# Altium PCB PCB_2D.PcbDoc (part 1 of 2)
Units mm, origin at the board's own origin, x right, y up, seen from the top; angles counter-clockwise.
Board outline 202 x 202 mm, 2 copper layers (Top Layer, Bottom Layer); 193 components, 102 nets, 533 pads, 52 vias.
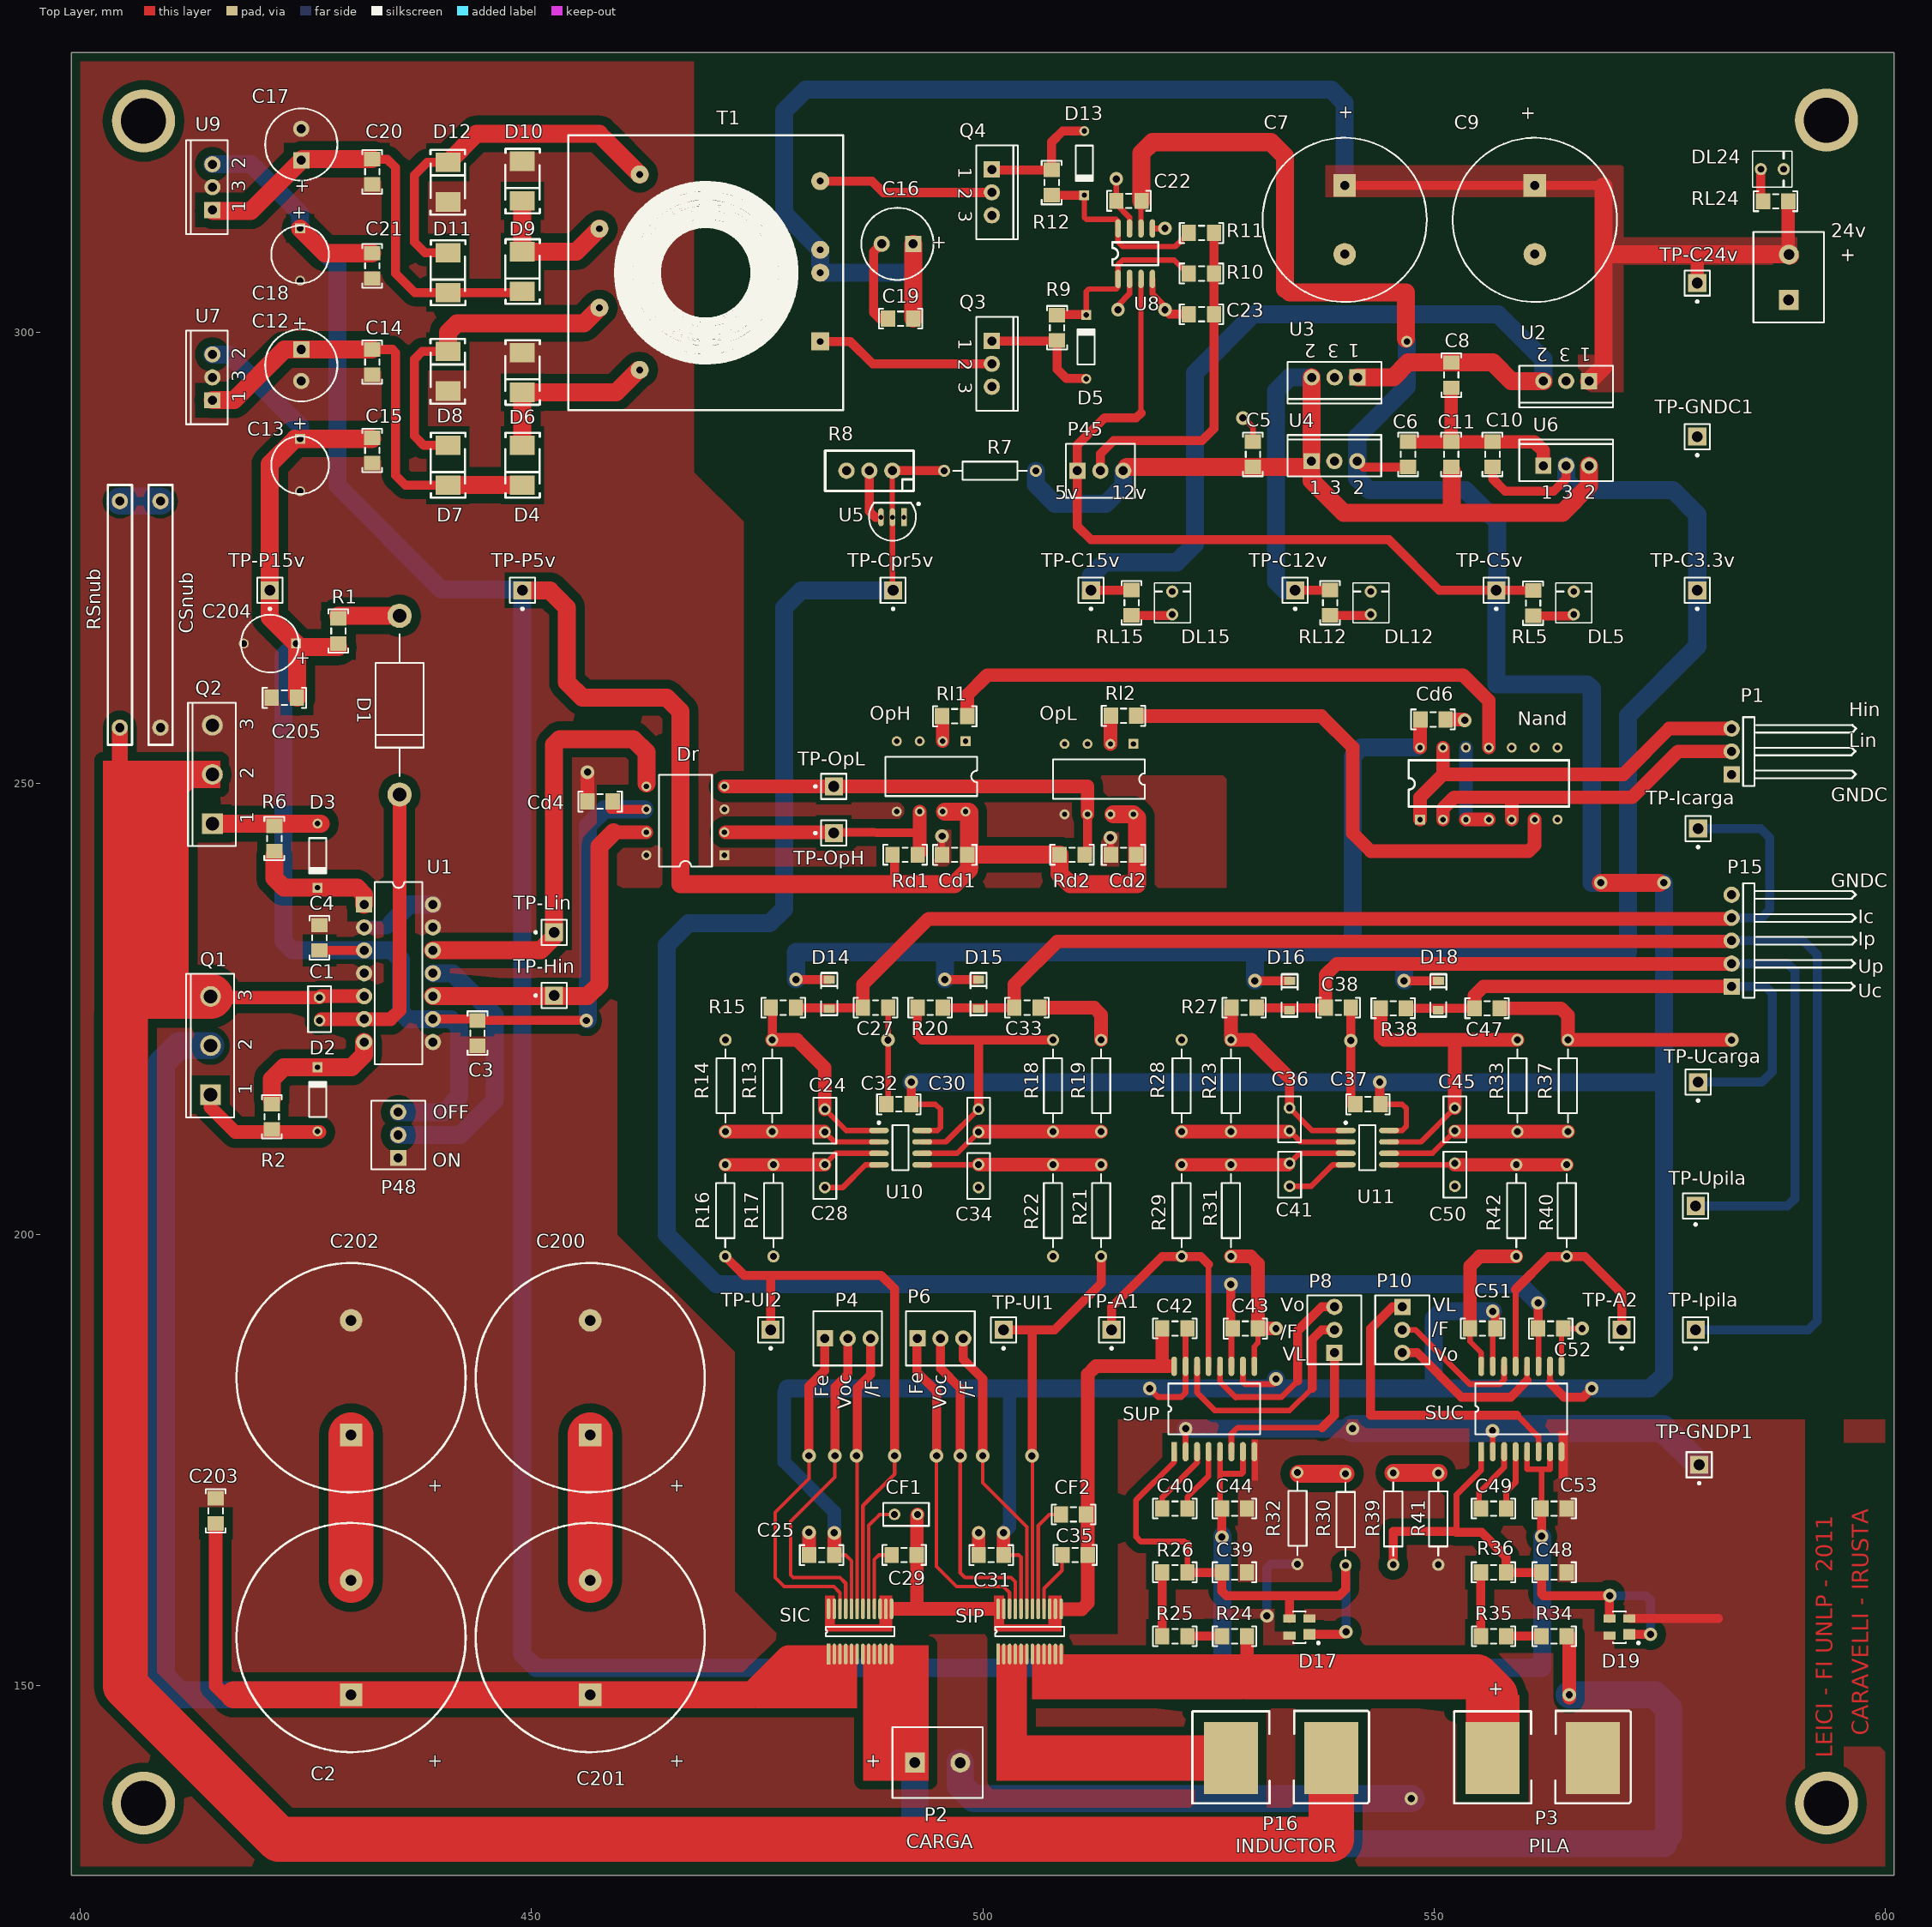
[diagram p0: Top Layer view]
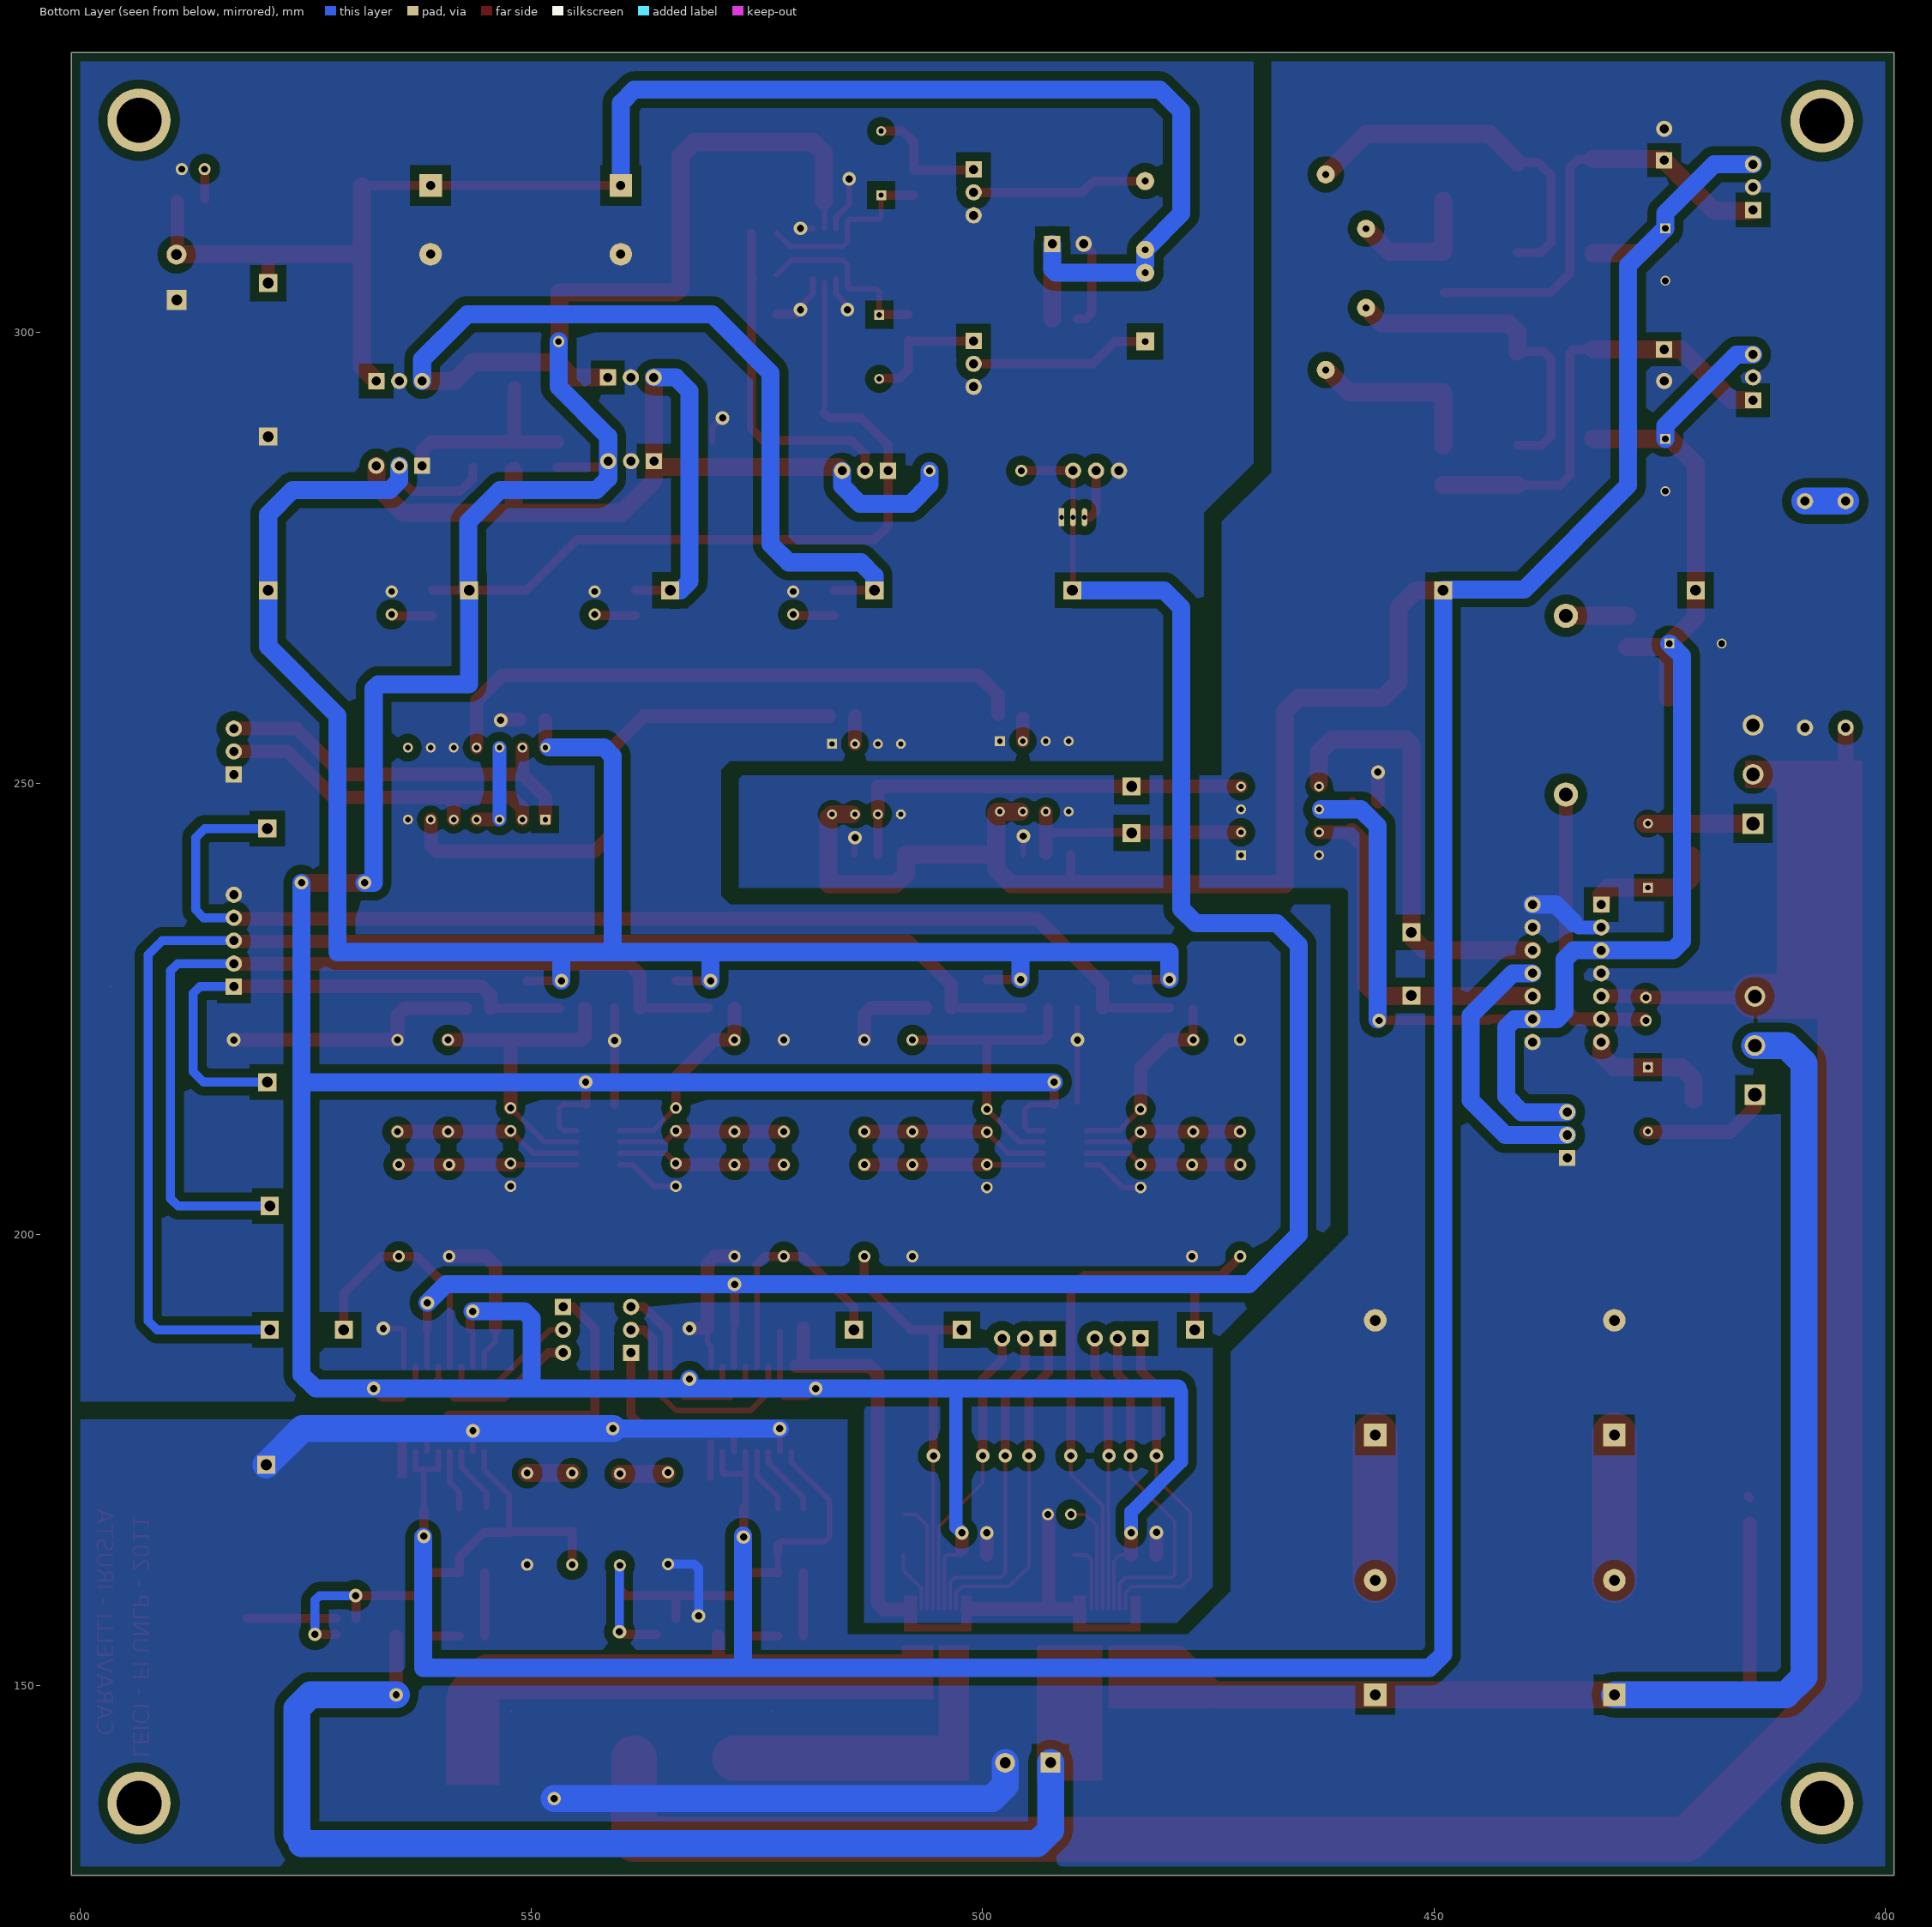
[diagram p1: Bottom Layer view, seen from below]

## Layer stack, top to bottom
Top Layer: signal copper 0.0356
Dielectric: dielectric 0.32, FR-4, Dk 4.8
Bottom Layer: signal copper 0.0356

## Board outline
399,331 601,331 601,129 399,129 399,331

## Design rules (kind name [scope] priority, off if disabled: settings)
Clearance [InPolygon] p1: gap=1
PolygonConnect [All] p1: connectstyle=Direct reliefconductorwidth=0.254 reliefentries=4 polygonreliefangle="90 Angle"
RoutingVias [All] p1: holewidth=0.8 width=1.5 viastyle="Through Hole" minholewidth=0.8 minwidth=1.5 maxholewidth=0.8 maxwidth=1.5
SilkscreenOverComponentPads [All] p1: minsilkscreentomaskgap=0.254
SolderMaskExpansion [All] p1: expansion=0.102
Width [All] p1: maxlimit=6 minlimit=0.2 preferedwidth=1 minimp=50.000000 maximp=50.000000 favimp=50.000000
27 further rules are at their usual default settings.

## Classes and differential pairs
component class "sensor de tension": C36 C37 C38 C39 C40 C41 C42 C43 C44 C45 C47 C48 C49 C50 C51 C52 C53 D16 D17 D18 D19 P8 P10 P15 R23 R24 R25 R26 R27 R28 R29 R30 R31 R32 R33 R34 R35 R36 R37 R38 R39 R40 R41 R42 SUC SUP TP-A1 TP-A2 TP-Ucarga TP-Upila U11
component class "sensor de corriente": C24 C25 C27 C28 C29 C30 C31 C32 C33 C34 C35 CF1 CF2 D14 D15 P4 P6 R13 R14 R15 R16 R17 R18 R19 R20 R21 R22 SIC SIP TP-Icarga TP-Ipila TP-UI1 TP-UI2 U10
component class fuentes_15V_5V_3.3V: 24v C5 C6 C7 C8 C9 C10 C11 C12 C13 C14 C15 C16 C17 C18 C19 C20 C21 C22 C23 D4 D5 D6 D7 D8 D9 D10 D11 D12 D13 DL5 DL12 DL15 DL24 P45 Q3 Q4 R7 R8 R9 R10 R11 R12 RL5 RL12 RL15 RL24 T1 TP-C3.3v TP-C5v TP-C12v TP-C15v TP-C24v TP-Cpr5v TP-P5v TP-P15v U2 U3 U4 U5 U6 U7 U8 U9
component class "driver y convertidor": C1 C2 C3 C4 C200 C201 C202 C203 C204 C205 Cd1 Cd2 Cd4 Cd6 Csnub D1 D2 D3 Dr L1 Nand OpH OpL P1 P2 P3 P16 P48 Q1 Q2 R1 R2 R6 Rd1 Rd2 Rl1 Rl2 RSnub TP-GNDC1 TP-GNDP1 TP-Hin TP-Lin TP-OpH TP-OpL U1

## Components (designator, comment, footprint, x,y, rotation, side; value= is the part's Value field where it differs from the comment)
24v "Alimentacion 24v" HDR1X2-POT* 589.32,306.096 r90 top (schematic designator 1)
C1 "CapBootstrap" RAD-0.1 426.5,225 r90 top
C2 "Cap Pol1" RB12.7-25* 430,149 r270 top
C3 "Cap3" 8-1206 444,223.73 r270 top
C4 "Cap4" 8-1206 426.5,231.5 r90 top
C5 "Cap5" 8-1206 529.951,285.062 r90 top
C6 "Cap6" 8-1206 547.145,285.062 r90 top
C7 "Cap Pol1" RB7.6-18.2* 540.111,312.454 r90 top
C8 "Cap8" 8-1206 551.922,296.645 r270 top
C9 "Cap Pol1" RB7.6-18.2* 561.193,312.454 r90 top
C10 "Cap10" 8-1206 556.5,285.062 r90 top
C11 "Cap11" 8-1206 551.922,285.062 r90 top
C12 "Cap Pol1" RB3.5-8* 424.475,298.093 r270 top
C13 "Cap Pol1" RB5.8-6.4* 424.35,285.283 r270 top
C14 "Cap14" 8-1206 432.349,295.293 r90 top
C15 "Cap15" 8-1206 432.349,285.5 r90 top
C16 "Cap Pol1" RB3.5-8* 492.3,309.8 r180 top
C17 "Cap Pol1" RB3.5-8* 424.475,319.05 r90 top
C18 "Cap Pol1" RB5.8-6.4* 424.35,308.611 r270 top
C19 "Cap19" 8-1206 489.5,301.5 r0 top
C20 "Cap20" 8-1206 432.349,316.375 r90 top
C21 "Cap21" 8-1206 432.349,305.961 r90 top
C22 "Cap22" 8-1206 514.799,314.556 r0 top
C23 "Cap23" 8-1206 525.639,302 r180 top
C24 "Cap24" RAD-0.1 482.5,212.635 r90 top
C25 "Cap25" 8-1206 483.546,164.5 r180 top
C27 "Cap27" 8-1206 486.721,225.145 r0 top
C28 "Cap28" RAD-0.1 482.5,206.5 r270 top
C29 "Cap29" 8-1206 489.896,164.5 r0 top
C30 "Cap30" RAD-0.1 499.542,212.635 r90 top
C31 "Cap31" 8-1206 502.342,164.5 r180 top
C32 "Cap32" 8-1206 492.094,214.452 r180 top
C33 "Cap33" 8-1206 503.5,225.145 r0 top
C34 "Cap34" RAD-0.1 499.542,206.5 r270 top
C35 "Cap35" 8-1206 508.847,164.5 r0 top
C36 "Cap36" RAD-0.1 534,212.77 r90 top
C37 "Cap37" 8-1206 544.094,214.452 r180 top
C38 "Cap38" 8-1206 538,225.145 r0 top
C39 "Cap39" 8-1206 526.5,162.569 r0 top
C40 "Cap40" 8-1206 519.893,169.637 r0 top
C41 "Cap41" RAD-0.1 534.009,206.635 r270 top
C42 "Cap42" 8-1206 519.893,189.599 r0 top
C43 "Cap43" 8-1206 530.5,189.599 r180 top
C44 "Cap44" 8-1206 526.5,169.637 r0 top
C45 "Cap45" RAD-0.1 552.33,212.77 r90 top
C47 "Cap47" 8-1206 554.5,225.084 r0 top
C48 "Cap48" 8-1206 561.93,162.569 r0 top
C49 "Cap49" 8-1206 555.211,169.637 r0 top
C50 "Cap50" RAD-0.1 552.33,206.635 r270 top
C51 "Cap51" 8-1206 554,189.599 r0 top
C52 "Cap52" 8-1206 564.343,189.599 r180 top
C53 "Cap53" 8-1206 561.93,169.637 r0 top
C200 "Cap Pol1" RB12.7-25* 456.5,177.8 r270 top
C201 "Cap Pol1" RB12.7-25* 456.5,149 r270 top
C202 "Cap Pol1" RB12.7-25* 430,177.8 r270 top
C203 "Cap4" 8-1206 415,168 r90 top
C204 "Cap Pol1" RB5.8-6.4* 421,265.5 r180 top
C205 "Cap4" 8-1206 424,259.5 r180 top
Cd1 "Capd1" 8-1206 498.298,242.096 r180 top
Cd2 "Capd2" 8-1206 517,242.096 r180 top
Cd4 "Capd2" 8-1206 459,248 r180 top
Cd6 "Capd2" 8-1206 548.5,257.08 r0 top
CF1 "CapF1" RAD-0.1 491.5,169 r180 top
CF2 "CapF2" 8-1206 511.466,169 r180 top
CSnub "CapSnub" FOOTSNUB 408.872,268.73 r270 top (schematic designator Csnub)
D1 "MUR160 (460)" "CASE 267*" 435.5,263.5 r270 top
D2 "Diode 1N4148" DO-35 426.285,215 r90 top
D3 "Diode 1N4148" DO-35 426.285,242 r270 top
D4 "MBR0540" CASE403A* 448.986,285.26 r270 top
D5 "Diode 1N4148" DO-35 511.466,298.377 r90 top
D6 "MBR0540" CASE403A* 448.986,295.547 r270 top
D7 "MBR0540" CASE403A* 440.731,285.26 r270 top
D8 "MBR0540" CASE403A* 440.731,295.674 r90 top
D9 "MBR0540" CASE403A* 448.986,306.723 r270 top
D10 "MBR0540" CASE403A* 448.986,316.756 r270 top
D11 "MBR0540" CASE403A* 440.731,306.596 r270 top
D12 "MBR0540" CASE403A* 440.731,316.629 r90 top
D13 "Diode 1N4148" DO-35 511.254,318.741 r270 top
D14 "BAT54" SOD123* 483,226.645 r90 top
D15 "BAT54" SOD123* 499.542,226.645 r90 top
D16 "BAT54" SOD123* 534.009,226.5 r90 top
D17 "BAS28" SOT-143* 535.094,156.5 r90 top
D18 "BAT54" SOD123* 550.5,226.5 r90 top
D19 "BAS28" SOT-143* 570.566,156.5 r90 top
DL5 "LED4" LED-1* 565.5,270 r180 top
DL12 "LED3" LED-1* 543,270 r180 top
DL15 "LED2" LED-1* 521,270 r180 top
DL24 "LED1" LED-1* 587.5,318.078 r90 top
Dr "TC4427" TC4424-DIP8 471.38,242.05 r180 top
Nand "74HCT00" MM74HC00_GON 548.466,246 r90 top
OpH "6N137" 6N137 498.096,254.68 r270 top
OpL "6N137" 6N137 516.693,254.38 r270 top
P1 "Header 3H" HDR1X3H* 583,251 r90 top
P2 "Header 2" HDR1X2-POT* 495,141.5 r0 top
P3 "Header 2" IND-CONECTOR 556.5,142 r0 top
P4 "Header 3" HDR1X3* 482.5,188.5 r0 top
P6 "Header 3" HDR1X3* 492.77,188.5 r0 top
P8 "Header 3" HDR1X3* 538.968,186.909 r90 top
P10 "Header 3" HDR1X3* 546.5,191.989 r270 top
P15 "Header 5" HDR1X5H* 583,227.5 r90 top
P16 "Header 2" IND-CONECTOR 527.504,142 r0 top
P45 "Header 3" HDR1X3* 510.5,284.654 r0 top
P48 "Header 10" HDR1X3* 435.23,208.5 r90 top
Q1 "IRFP250" TO-247AC 414.426,215.5 r90 top
Q2 "IRFP250" TO-247AC 414.626,245.55 r90 top
Q3 "IRF7380" TO220-MOS 501,296.5 r270 top
Q4 "IRF7380" TO220-MOS 501,315.5 r270 top
R1 "Rbootstrap" 8-1206 428.6,265.5 r90 top
R2 "Res2" 8-1206 421.2,214.452 r270 top
R6 "Res6" 8-1206 421.5,242.5 r90 top
R7 "Res7" AXIAL-0.4 500.802,284.654 r0 top
R8 "RPot" VR* 487.439,284.654 r0 top
R9 "Res9" 8-1206 508.237,301.904 r270 top
R10 "Res10" 8-1206 522.839,306.5 r0 top
R11 "Res11" 8-1206 525.639,311 r180 top
R12 "Res12" 8-1206 507.647,315.191 r90 top
R13 "Res13" AXIAL-0.4 476.672,216.496 r90 top
R14 "Res14" AXIAL-0.4 471.5,216.496 r270 top
R15 "Res15" 8-1206 476.5,225.145 r0 top
R16 "Res16" AXIAL-0.4 471.465,202.666 r90 top
R17 "Res17" AXIAL-0.4 476.799,202.666 r270 top
R18 "Res18" AXIAL-0.4 507.787,216.496 r90 top
R19 "Res19" AXIAL-0.4 513.121,216.496 r270 top
R20 "Res20" 8-1206 492.77,225.145 r0 top
R21 "Res21" AXIAL-0.4 513.121,202.666 r90 top
R22 "Res22" AXIAL-0.4 507.787,202.666 r270 top
R23 "Res23" AXIAL-0.4 527.504,216.496 r90 top
R24 "Res24" 8-1206 529.3,155.5 r180 top
R25 "Res25" 8-1206 522.693,155.502 r180 top
R26 "Res26" 8-1206 519.893,162.569 r0 top
R27 "Res27" 8-1206 527.565,225.145 r0 top
R28 "Res28" AXIAL-0.4 522.043,216.496 r270 top
R29 "Res29" AXIAL-0.4 522.043,202.666 r90 top
R30 "Res30" AXIAL-0.4 540.216,168.435 r90 top
R31 "Res31" AXIAL-0.4 527.504,202.666 r270 top
R32 "Res32" AXIAL-0.4 534.882,168.562 r270 top
R33 "Res33" AXIAL-0.4 559.263,216.496 r90 top
R34 "Res34" 8-1206 564.724,155.502 r180 top
R35 "Res35" 8-1206 558.011,155.502 r180 top
R36 "Res36" 8-1206 555.211,162.569 r0 top
R37 "Res37" AXIAL-0.4 564.851,216.496 r270 top
R38 "Res38" 8-1206 544.094,225.084 r0 top
R39 "Res39" AXIAL-0.4 545.5,168.5 r90 top
R40 "Res40" AXIAL-0.4 564.724,202.666 r90 top
R41 "Res41" AXIAL-0.4 550.49,168.5 r270 top
R42 "Res42" AXIAL-0.4 559.136,202.666 r270 top
Rd1 "Rd1" 8-1206 490,242.096 r0 top
Rd2 "Rd2" 8-1206 508.5,242.096 r0 top
Rl1 "Rd1" 8-1206 498.298,257.453 r180 top
Rl2 "Rd1" 8-1206 517,257.5 r180 top
RL5 "ResL5" 8-1206 561,268.58 r90 top
RL12 "ResL12" 8-1206 538.5,268.629 r90 top
RL15 "ResL15" 8-1206 516.5,268.629 r90 top
RL24 "ResL24" 8-1206 586.47,314.507 r0 top
RSnub "ResSnub" FOOTSNUB 404.372,268.73 r270 top
SIC "SI 1 20BB" "SENSOR CORRIENTE ACS 709" 482.911,153.525 r90 top
SIP "SI 1 20BB" "SENSOR CORRIENTE ACS 709" 501.707,153.525 r90 top
SUC "S2" "SENS TENSION HCPL-788J" 555.251,175.946 r90 top
SUP "S1" "SENS TENSION HCPL-788J" 521.215,175.946 r90 top
T1 "Trans BB" TRAFO-2PRI-2SEC 482,298.976 r180 top
TP-A1 "" PIN1 514.28,189.449 r180 top (schematic designator TP-ABSVAL1)
TP-A2 "" PIN1 570.82,189.449 r180 top (schematic designator TP-ABSVAL2)
TP-C3.3v "" PIN1 579.189,271.399 r180 top
TP-C5v "" PIN1 556.907,271.399 r180 top
TP-C12v "" PIN1 534.626,271.399 r180 top
TP-C15v "" PIN1 512,271.399 r180 top
TP-C24v "" PIN1 579.189,305.453 r180 top
TP-Cpr5v "" PIN1 490.063,271.399 r180 top
TP-GNDC1 "" PIN1 579.189,288.426 r180 top
TP-GNDP1 "" PIN1 579.401,174.5 r180 top
TP-Hin "" PIN1 452.5,226.5 r90 top
TP-Icarga "" PIN1 579.283,245 r180 top
TP-Ipila "" PIN1 579,189.449 r180 top
TP-Lin "" PIN1 452.5,233.5 r90 top
TP-OpH "" PIN1 483.5,244.5 r90 top
TP-OpL "" PIN1 483.5,249.67 r90 top
TP-P5v "" PIN1 448.986,271.399 r180 top
TP-P15v "" PIN1 421,271.399 r180 top
TP-Ucarga "" PIN1 579.283,216.906 r180 top
TP-UI1 "" PIN1 502.31,189.449 r180 top
TP-UI2 "" PIN1 476.5,189.449 r180 top
TP-Upila "" PIN1 579,203.177 r180 top
U1 "IR2110" PDIP14 431.444,236.583 r270 top
U2 "MC7815ACT" TO220* 564.668,294.593 r180 top
U3 "MC7812ACT" TO220* 539,295 r180 top
U4 "MC7805ACT" TO220* 538.968,285.712 r0 top
U5 "LM336BZ-5.0" Z03A 489.996,279.5 r90 top
U6 "MC7833ACT" TO220* 564.668,285.212 r0 top
U7 "MC7815ACT" TO220* 414.626,295 r90 top
U8 "MAX845" SO-8 515,305.912 r90 top
U9 "MC7805ACT" TO220* 414.626,316.078 r90 top
U10 "TLC2272" 751-02_N 490.896,209.645 r0 top
U11 "TLC2272" 751-02_N 542.626,209.645 r0 top

## Footprints (in the part's own frame and the unit in brackets; to place one, negate y for a bottom-side part, rotate by r counter-clockwise, add the part's x,y. Pads: shape width x height; smd on the part's side, far side on the other; paste and mask are expansions set on the pad)
6N137 [mm]
  rect 1.1x1.1 hole 0.6: 1(0,0)
  round 1.1 hole 0.6: 2(0,-2.54) 3(0,-5.08) 4(0,-7.62) 5(7.8,-7.62) 6(7.8,-5.08) 7(7.8,-2.54) 8(7.8,0)
  silkscreen extent 1.72,-8.89 6.08,1.27
8-1206 [mm] "Chip Resistor; Body 3.1 x 1.6 mm (LxW typ)"
  rect 1.6x1.8 smd: 1(0,0) 2(2.8,0)
  silkscreen extent -1.02,-1.09 3.81,1.12
751-02_N [mm] "SOIC, 8-Leads, Body 4.9x3.9mm, Pitch 1.27mm, IPC Medium Density"
  oval 2.2x0.6 smd: 1(-2.4,1.905) 2(-2.4,0.635) 3(-2.4,-0.635) 4(-2.4,-1.905) 5(2.4,-1.905) 6(2.4,-0.635) 7(2.4,0.635) 8(2.4,1.905)
  silkscreen extent -2.52,-2.5 0.9,2.88, body extent -1.95,-2.45 1.95,2.45, height 1.75
AXIAL-0.4 [mm] "Axial Device, Thru-Hole; 2 Leads; 0.4 in Pin Spacing"
  round 1.35 hole 0.75: 1(-5.08,0) 2(5.08,0)
  silkscreen extent -4.06,-1.02 4.06,1.02
CASE403A* [mm] "MBRS1100"
  rect 2.16x2.75 smd: 1(-2.2,0) 2(2.2,0)
  silkscreen extent -3.58,-1.91 3.58,1.93
"CASE 267*" [mm] "Axial Diode MUR460, Thru-Hole; 2 Leads"
  round 2.7 hole 1.5: 1(-5.08,-0.127) 2(14.732,-0.127)
  silkscreen extent -3.05,-2.79 12.7,2.54
DO-35 [mm] "Diode, Axial 1n4148; Body 3.8 x 1.9 mm (LxDia. max), Lead Dia. 0.53 mm (max)"
  round 1.1 hole 0.6: 1(-3.55,0)
  rect 1.1x1.1 hole 0.6: 2(3.55,0)
  silkscreen extent -1.95,-0.95 2.05,0.95
FOOTSNUB [mm] "Axial Device, Thru-Hole; 2 Leads; 0.4 in Pin Spacing"
  round 1.8 hole 1: 1(-12.548,0) 2(12.548,0)
  silkscreen extent -14.35,-1.32 14.45,1.35
HDR1X2-POT* [mm] "Connector; Header; 2 Position"
  rect 2.2x2.2 hole 1.2: 1(-2.515,0)
  round 2.2 hole 1.2: 2(2.515,-0.025)
  silkscreen extent -5,-3.91 5,3.91
HDR1X3* [mm] "Connector; Header; 3 Position"
  rect 1.8x1.8 hole 1: 1(0,0)
  round 1.8 hole 1: 2(2.54,0) 3(5.08,0)
  silkscreen extent -1.27,-3 6.35,3
HDR1X3H* [mm] "Connector; Header; 3 Position; Right Angle"
  rect 1.8x1.8 hole 1: 1(0,0)
  round 1.8 hole 1: 2(2.54,0) 3(5.08,0)
  silkscreen extent -1.27,-13.79 6.35,-1.27
HDR1X5H* [mm] "Connector; Header; 5 Position; Right Angle"
  rect 1.8x1.8 hole 1: 1(0,0)
  round 1.8 hole 1: 2(2.54,0) 3(5.08,0) 4(7.62,0) 5(10.16,0)
  Top Layer lines w0.254: 0.013,-13.602 0.025,-13.602
  silkscreen extent -1.27,-13.79 11.43,-1.27
IND-CONECTOR [mm]
  rect 6x8 smd: 1(0,0) 2(11.125,0)
  Top Layer lines w0.254: -4.267,5.131 -4.216,5.182
  silkscreen extent -4.27,-5 15.32,5.23
LED-1* [mm] "LED; 2 Leads"
  round 1.35 hole 0.75: 1(0,1.27) 2(0,-1.27)
  silkscreen extent -2,-2.2 1.98,2.2
MM74HC00_GON [mm]
  rect 1.1x1.1 hole 0.6: 1(0,0)
  round 1.1 hole 0.6: 2(0,-2.54) 3(0,-5.08) 4(0,-7.62) 5(0,-10.16) 6(0,-12.7) 7(0,-15.24) 8(7.976,-15.24) 9(7.976,-12.7) 10(7.976,-10.16) 11(7.976,-7.62) 12(7.976,-5.08) 13(7.976,-2.54) 14(7.976,0)
  silkscreen extent 1.44,-16.51 6.58,1.27
PDIP14 [mm] "DIP; 14 Leads; Row Spacing 7.62 mm; Pitch 2.54 mm"
  rect 1.8x1.8 hole 1: 1(0,0)
  round 1.8 hole 1: 2(2.54,0) 3(5.08,0) 4(7.62,0) 5(10.16,0) 6(12.7,0) 7(15.24,0) 8(15.24,7.62) 9(12.7,7.62) 10(10.16,7.62) 11(7.62,7.62) 12(5.08,7.62) 13(2.54,7.62) 14(0,7.62)
  silkscreen extent -2.48,1.16 17.72,6.46
PIN1 [mm] "Connector; Plug"
  rect 2x2 hole 1.2: 1(0,0)
  silkscreen extent -1.4,-1.4 1.4,2.17
RAD-0.1 [mm] "Radial Cap, Thru-Hole; 2 Leads; 0.1 in Pin Spacing"
  round 1.3 hole 0.75: 1(-1.27,0) 2(1.27,0)
  silkscreen extent -2.54,-1.27 2.54,1.27
RB3.5-8* [mm]
  rect 1.8x1.8 hole 1: 1(0,0)
  round 1.8 hole 1: 2(3.5,0)
  silkscreen extent -2.25,-4 5.75,4
RB5.8-6.4* [mm] "cap feo"
  rect 1.1x1.1 hole 0.75: 1(-2.9,0)
  round 1.1 hole 0.75: 2(2.9,0)
  silkscreen extent -3.2,-3.2 3.2,3.2
RB7.6-18.2* [mm] "Polarized Capacitor (Radial); 2 Leads"
  rect 2.5x2.5 hole 1: 1(3.81,0)
  round 2.5 hole 1: 2(-3.81,0)
  silkscreen extent -9.1,-9.1 9.1,9.1
RB12.7-25* [mm] "Polarized Capacitor (Radial); 2 Leads"
  rect 2.5x2.5 hole 1.2: 1(0,0)
  round 2.5 hole 1.2: 2(-12.7,0)
  silkscreen extent -19.05,-12.7 6.35,12.7
"SENS TENSION HCPL-788J" [mm]
  rect 2.16x0.64 smd: 1(0,0)
  oval 2.16x0.64 smd: 2(0,-1.27) 3(0,-2.54) 4(0,-3.81) 5(0,-5.08) 6(0,-6.35) 7(0,-7.62) 8(0,-8.89) 9(9.47,-8.89) 10(9.47,-7.62) 11(9.47,-6.35) 12(9.47,-5.08) 13(9.47,-3.81) 14(9.47,-2.54) 15(9.47,-1.27) 16(9.47,0)
  silkscreen extent 1.91,-9.53 7.55,0.64
"SENSOR CORRIENTE ACS 709" [mm]
  rect 2.3x0.4 smd: 1(0,0)
  oval 2.3x0.4 smd: 2(0,-0.635) 3(0,-1.27) 4(0,-1.905) 5(0,-2.54) 6(0,-3.175) 7(0,-3.81) 8(0,-4.445) 9(0,-5.08) 10(0,-5.715) 11(0,-6.35) 12(0,-6.985) 13(5,-6.985) 14(5,-6.35) 15(5,-5.715) 16(5,-5.08) 17(5,-4.445) 18(5,-3.81) 19(5,-3.175) 20(5,-2.54) 21(5,-1.905) 22(5,-1.27) 23(5,-0.635) 24(5,0)
  silkscreen extent 1.98,-7.3 3.02,0.32
SO-8 [mil]
  oval 80x24 smd: 1(0,0) 2(0,-50) 3(0,-100) 4(0,-150) 5(220,-150) 6(220,-100) 7(220,-50) 8(220,0)
  silkscreen extent 60,-175 160,25
SOD123* [mm] "SOD-123; 2 Leads; Body 2.7 x 1.6 mm, (LxW)"
  rect 0.91x1.22 smd: 1(-1.63,0.01) 2(1.64,0)
  silkscreen extent -2.37,-0.89 2.36,0.9
SOT-143* [mm] "SOT-143; 4 Leads; Body 3 x 2.6 mm, inc. leads (LxW max)"
  rect 1.2x1.35 smd: 1(-0.8,-1.1)
  rect 0.9x1.35 smd: 2(0.95,-1.1) 3(0.95,1.1) 4(-0.95,1.1)
  silkscreen extent -1.87,-2.23 1.75,0.7
TC4424-DIP8 [mm]
  rect 1.1x1.1 hole 0.6: 1(0,0)
  round 1.1 hole 0.6: 2(0,-2.54) 3(0,-5.08) 4(0,-7.62) 5(8.65,-7.62) 6(8.65,-5.08) 7(8.65,-2.54) 8(8.65,0)
  silkscreen extent 1.38,-8.89 7.27,1.27
TO220* [mm] "TO, Thru-Hole, Vertical, Heatsink Mounted; 3 In-Line Leads; Pitch 2.54 mm; Pin sequence 1, 3, 2"
  rect 1.8x1.8 hole 1: 1(-2.54,0)
  round 1.8 hole 1: 2(2.54,0) 3(0,0)
  silkscreen extent -5.2,-1.7 5.2,2.9
TO220-MOS [mm] "TO, Thru-Hole, Vertical, Heatsink Mounted; 3 In-Line Leads; Pitch 2.54 mm; Pin sequence 1, 3, 2"
  rect 1.8x1.8 hole 1: 1(-2.54,0)
  round 1.8 hole 1: 2(0,0) 3(2.54,0)
  silkscreen extent -5.2,-1.7 5.2,2.9
TO-247AC [mm] "SIP with Mounting Hole; 3 Leads; Body 20 x 15.6 x 5 mm (typ); Pitch 5.45 mm"
  rect 2.3x2.3 hole 1.5: 1(0,0)
  round 2.3 hole 1.5: 2(5.45,0) 3(10.9,0)
  silkscreen extent -2.5,-2.6 13.4,2.7
TRAFO-2PRI-2SEC [mm]
  rect 2x2 hole 0.75: 1(0,0)
  round 2 hole 0.75: 2(0,-7.62) 3(0,-10.16) 4(0,-17.78) 5(20.015,3.15) 6(24.486,-3.734) 7(24.486,-12.497) 8(20.015,-18.517)
  silkscreen extent -2.54,-22.86 27.94,7.62
VR* [mm] "preset multivuelta vertical"
  round 1.8 hole 1: 1(2.54,0) 2(0,0) 3(-2.54,0)
  silkscreen extent -4.9,-2.24 4.9,2.24
Z03A [mm] "TO, Flat Index; 3 In-Line, Axial Leads; Body Dia. 5mm; Leads 0.55 x 0.50 mm (max)"
  rect 2x0.6 hole 0.5: 1(0,-1.27)
  oval 2x0.6 hole 0.5: 2(0,0) 3(0,1.27)
  silkscreen extent -2.6,-3.03 1.6,2.6, body extent -2.61,-2.61 1.6,2.61, height 5.2

## Part data
24v: library part "Header 2", "Header, 2-Pin"
C1 C24 C28 C30 C34 C36 C41 C45 C50: library part Cap, "THRU MULTICAPA 50V"
C2 C7 C9 C12 C13 C16 C17 C18 C200 C201 C202 C204: "Polarized Capacitor (Radial)"
C3 C4 C5 C6 C8 C10 C11 C14 C15 C19 C20 C21 C22 C23 C25 C27 C29 C31 C32 C33 C35 C37 C38 C39 C40 C42 C43 C44 C47 C48 C49 C51 C52 C53 C203 C205 Cd1 Cd2 Cd4 Cd6 CF1 CF2 CSnub: library part Cap, "SMD MULTICAPA 50V"
D1: library part "Diode 1N4007", "THRU"
D2 D3 D5 D13: "THRU"
D4 D6 D7 D8 D9 D10 D11 D12: library part Diode, "SMD"
D14 D16 D17 D18: "SMD"
D15: "Schottky Barrier Diode SMD"
D19: "High-speed Switching, Double Diode SMD"
DL5 DL12 DL15: library part LED1, "Typical RED GaAs LED"
DL24: "Typical RED GaAs LED"
P1: "Header, 3-Pin, Right Angle"
P2 P3 P16: "Header, 2-Pin"
P4 P6 P8 P10 P45: "Header, 3-Pin"
P15: "Header, 5-Pin"
P48: library part "Header 3", "Header, 3-Pin"
Q1 Q2: "HEXFET Power MOSFET"
Q3 Q4: library part IRFP250, "HEXFET Power MOSFET"
R1 R2 R6 R9 R12 R15 R20 R24 R25 R26 R27 R34 R35 R36 R38 Rd1 Rd2 Rl1 Rl2 RL5 RL12 RL15 RL24 RSnub: library part Res1, "SMD 1206"
R7: library part Res3, "Resistor"
R8: "PRESET MULTIVUELTA VERTICAL"
R10 R11 R13 R14 R16 R17 R18 R19 R21 R22 R23 R28 R29 R30 R31 R32 R33 R37 R39 R40 R41 R42: library part Res1, "Resistor"
SIC SIP SUC SUP: library part Component_1
T1: "Buck-boost Transformer (Ideal)"
TP-A1 TP-A2 TP-C3.3v TP-C5v TP-C12v TP-C15v TP-C24v TP-Cpr5v TP-GNDC1 TP-GNDP1 TP-Hin TP-Icarga TP-Ipila TP-Lin TP-OpH TP-OpL TP-P5v TP-P15v TP-Ucarga TP-UI1 TP-UI2 TP-Upila: library part Socket, "Socket"
U1: "High and Low Side Driver"
U2 U3 U6 U7: library part MC7805ACT, "Three-Terminal Positive Voltage Regulator"
U4 U9: "Three-Terminal Positive Voltage Regulator"
U5: "5.0V Reference Diode"
U10 U11: library part TLC27L2ACDR, "LinCMOS Precision Dual Operational Amplifier"

## Free pads (board coordinates)
  round 7 hole 5: 0(407,137) 5(407,323.421) 8(593.5,323.5) 9(593.5,137)
  round 1.5 hole 0.8: 1(541,178.5)

## Via types
v1: diameter 1.5, hole 0.8, Top Layer to Bottom Layer, 51 vias
v2: diameter 1.27, hole 0.711, Top Layer to Bottom Layer, 1 vias

## Nets (pads, with @x,y where several pads share a name; then routed paths per layer and width w, separated by ;. In a path a pad name is that pad's centre, name@x,y a point inside that pad or via, vN(x,y) a via of type N, cw(c..) or ccw(c..) an arc to the next point about the centre after c; other vN are vias at no path point)
C_3.3V: C10.1 Cd6.1 D14.2 D15.2 D16.2 D18.2 Nand.14 TP-C3.3v.1 U6.3 | length 233
  Top Layer w1: v1(479.3,228.285) D14.2@483,228.285 ; v1(495.8,228.285) D15.2@499.5,228.285 ; v1(530.165,228.14) D16.2@534.009,228.14 ; v1(546.694,228.14) D18.2@550.5,228.14 ; C10.1@556.5,285.062 556.5,283.786 557.903,282.383 563.286,282.383 564.668,283.765 U6.3@564.668,285.212
  Top Layer w1.5: Nand.14@548.466,253.976 Cd6.1@548.466,257.046
  Bottom Layer w2: v1@479.306,228.291 479.306,231.306 541,231.306 ; v1(495.8,228.285) 495.8,231.106 ; v1(530.165,228.14) 530.165,231.185 ; v1(546.694,228.14) 546.694,231.306 ; Nand.14@548.074,253.976 541.976,253.976 541,253 541,231.306 ; U6.3@564.668,285.212 564.668,283.556 565.724,282.5 576.5,282.5 579.189,279.811 TP-C3.3v.1@579.189,271.399 579.189,265.189 571.5,257.5 571.5,231.306 546.694,231.306 ; 541,231.306 546.694,231.306
C_5V: C6.1 C22.2 C25.1 C31.1 C32.1 C37.1 C42.2 C51.2 P45.1 RL5.2 SIC.20 SIP.20 SUC.10 SUC.15 SUP.10 SUP.15 TP-C5v.1 U4.2 U8.3 U8.6 U10.8 U11.8 | length 598.2
  Top Layer w0.4: C25.1@483.546,164.5 484.793,164.5 485.451,163.842 SIC.20@485.451,158.525 ; C31.1@502.342,164.5 504,164.5 504.247,164.253 SIP.20@504.247,158.525
  Top Layer w0.6: C32.1@492.094,214.452 494.762,214.452 495.31,213.905 495.31,211.86 495,211.55 U10.8@493.296,211.55 ; 517.54,291.04 U8.3@517.54,305.5 ; U8.6@517.54,311.5 C22.2@517.54,314.497 ; C37.1@544,214.452 C37.1@544.094,214.452 546.5,214.452 546.95,214.002 546.95,212 546.5,211.55 U11.8@545.026,211.55 ; SUC.15@556.521,185.416 C51.2@556.521,189.32
  Top Layer w0.64: v1(518.5,182.949) 519.449,182 522,182 522.485,182.485 SUP.15@522.485,185.416 C42.2@522.485,189.241 ; 528.835,183.705 SUP.10@528.835,185.416 ; 562.871,183.562 SUC.10@562.871,185.416
  Top Layer w0.7: 528.835,183.705 529.107,183.433 532.227,183.433 v1@532.5,183.705
  Top Layer w0.8: v1@532.5,183.705 v1(532.5,184)
  Top Layer w1: C32.1@492.094,214.452 v1(492.094,216.906) ; 517.54,291.04 517,290.5 513.499,290.5 510.5,287.501 P45.1@510.5,284.654 510.5,278.5 512,277 545,277 550.601,271.399 TP-C5v.1@556.907,271.399 RL5.2@560.981,271.399 ; 533.607,304.799 534.009,304.396 ; U4.2@541.508,285.712 542.158,285.062 C6.1@547.145,285.062 ; C37.1@544,214.452 v1(544,216.906) ; v1(556.521,191.5) 556.8,191.221 C51.2@556.8,189.599 ; 562.871,183.562 564.433,182 566.551,182 v1(567.5,182.949)
  Top Layer w1.5: C25.1@483.546,164.5 v1(483.546,166.954) ; C31.1@502.31,165.19 v1(502.31,166.954)
  Top Layer w2: C22.2@517.599,314.556 517.599,319.856 518.81,321.068 531.932,321.068 533.5,319.5 533.5,304.799 ; 534.009,304.396 546.894,304.396 v2@546.894,299.282 ; v1(568.5,239) v1@575,239
  Bottom Layer w1.5: 478.381,182.949 478,182.568 478,174.823 483.546,169.277 v1(483.546,166.954) ; v1(502.31,166.954) 502.977,167.621 502.977,182.685
  Bottom Layer w2: 478.381,182.949 v1(518.5,182.949) 532.5,182.949 ; v1(492.094,216.906) v1(544,216.906) 575.5,216.906 ; v1(532.5,184) 532.5,182.949 ; v2(547,298.976) 547,293.96 541.508,288.468 541.508,283.797 542.805,282.5 553.5,282.5 557,279 TP-C5v.1@557,271.399 ; v1(556.521,191.5) 550.791,191.5 550,190.709 550,182.949 ; 556.907,261 567,261 567.5,260.5 567.5,239 v1(568.5,239) ; 556.907,261.093 TP-C5v.1@556.907,271.399 ; v1(575.5,239) 575.5,216.906 ; 532.5,182.949 550,182.949 ; 550,182.949 v1(567.5,182.949) 573.949,182.949 575.5,184.5 575.5,216.906
C_12V: C5.1 C11.1 P45.3 R7.2 RL12.2 TP-C12v.1 U3.2 U4.1 U6.2 | length 119.5
  Top Layer w1: TP-C12v.1@534.626,271.399 RL12.2@538.47,271.399 ; U4.1@535.778,285.062 U4.1@536.428,285.712 ; U4.1@535.895,285.136 U4.1@536.46,285.701
  Top Layer w2: P45.3@515.988,285.062 C5.1@529.951,285.062 U4.1@535.778,285.062 ; U4.1@536.392,285.136 536.428,283.572 540,280 552,280 ; U4.1@536.46,285.701 U3.2@536.46,295 ; C11.1@552,284.654 552,280 ; U6.2@567.208,285.212 567.208,282.984 564.224,280 552,280
  Bottom Layer w1: TP-C12v.1@534.601,271.399 TP-C12v.1@534.626,271.399
  Bottom Layer w2: R7.2@505.882,284.654 505.882,283.118 508,281 513.617,281 515.58,282.963 P45.3@515.58,284.654 ; TP-C12v.1@534.626,271.399 533.5,271.399 532.5,272.399 532.5,273.5 532.5,293.5 534,295 U3.2@536.46,295
C_15V: C8.1 RL15.2 TP-C15v.1 U2.2 U3.1 | length 105.9
  Top Layer w1: TP-C15v.1@512,271.399 RL15.2@516.47,271.399
  Top Layer w2: U3.1@541.54,295 545.5,295 547.145,296.645 C8.1@551.922,296.645 556.521,296.645 558.573,294.593 U2.2@562.128,294.593
  Bottom Layer w2: TP-C15v.1@512,271.399 512,273 513.5,274.5 521.5,274.5 523.5,276.5 523.5,295.5 530,302 557.122,302 562.128,296.994 U2.2@562.128,294.593
C_24V: 24v.2 C7.1 C9.1 C16.1 C19.2 RL24.2 T1.2 T1.3 TP-C24v.1 U2.1 | length 193.9
  Top Layer w1: C16.1@492.3,309.8 C16.1@492.5,310 ; C7.1@540.111,316.264 C9.1@561.193,316.264 568.702,316.264 568.821,316.145
  Top Layer w1.5: TP-C24v.1@579.189,305.453 579.189,308.518 ; 24v.2@589.27,308.636 RL24.2@589.27,314.507
  Top Layer w2: C19.2@492.3,301.5 C16.1@492.3,309.8 ; U2.1@567.208,294.593 568.821,296.206 568.821,308.636 ; 568.821,316.145 568.821,308.636 ; 24v.2@589.27,308.636 568.821,308.636 ; 24v.2@589.345,308.611 24v.2@589.456,308.5
  Bottom Layer w2: T1.2@482,306.596 491.908,306.596 492.3,306.988 C16.1@492.3,309.8 ; T1.2@482,307.5 T1.3@482,309.136 478,313.136 478,324.5 480.375,326.875 538.625,326.875 540.111,325.389 C7.1@540.111,316.264
C_PREC_5V: C43.2 C52.2 R7.1 R8.1 SUC.11 SUP.11 TP-Cpr5v.1 U5.2 | length 227
  Top Layer w0.6: U5.2@489.979,279.517 R8.1@489.979,284.654 ; TP-Cpr5v.1@489.996,271.466 U5.2@489.996,279.5
  Top Layer w0.64: SUP.11@527.565,185.416 C43.2@527.565,189.464 ; SUC.11@561.601,185.416 C52.2@561.601,189.541
  Top Layer w1: R8.1@489.979,284.654 R7.1@495.722,284.654 ; C43.2@527.504,190.099 v1(527.504,194.5) ; C52.2@561.543,189.599 v1(561.543,192.442)
  Bottom Layer w2: TP-Cpr5v.1@490.063,271.399 479.899,271.399 478,269.5 478,236.106 476.394,234.5 467.42,234.5 465,232.08 465,200 470.5,194.5 v1(527.504,194.5) 559.485,194.5 v1(561.543,192.442)
GNDC: 24v.1 C5.2 C6.2 C7.2 C8.2 C9.2 C10.2 C11.2 C16.2 C19.1 C22.1 C23.2 C25.2 C27.2 C28.2 C29.2 C31.2 C32.2 C33.2 C34.2 C35.2 C37.2 C38.2 C41.2 C42.1 C43.1 C47.2 C50.2 C51.1 C52.1 Cd6.2 CF1.1 CF2.1 DL5.2 DL12.2 DL15.2 DL24.2 Nand.7 Nand.9 Nand.10 OpH.1 OpH.3 OpH.4 OpL.1 OpL.3 OpL.4 P1.1 P15.5 Q3.3 Q4.3 R8.3 R14.1 R17.2 R19.1 R22.2 R28.1 R31.2 R37.1 R42.2 SIC.13 SIC.14 SIC.15 SIC.23 SIC.24 SIP.13 SIP.14 SIP.15 SIP.23 SIP.24 SUC.9 SUC.16 SUP.9 SUP.16 TP-GNDC1.1 U2.3 U3.3 U4.3 U5.1 U6.1 U8.2 U8.4 U8.5 U8.7 U10.4 U11.4 | length 257
  Top Layer w0.6: SIC.24@482.911,158.525 482.911,157.089 483.5,156.5 489.261,156.5 SIC.14@489.261,158.525 ; 487,207.74 U10.4@488.496,207.74 ; 502.239,156.5 508,156.5 ; SUP.9@530.105,185.416 530.105,187.605 530.5,188 C43.1@530.5,189.599 ; 538.786,207.74 U11.4@540.226,207.74 ; C51.1@554,189.599 554,188.16 555.251,186.909 SUC.16@555.251,185.416 ; SUC.9@564.141,185.416 C52.1@564.141,189.397 ; C52.1@564.343,189.599 v1(566.43,189.599)
  Top Layer w0.64: C28.2@482.5,205.23 484.49,205.23 487,207.74 ; C32.2@489.521,214.679 C27.2@489.521,225.145 ; v1(514.799,317) C22.1@514.799,314.556 514.799,314.201 516.27,312.73 U8.7@516.27,311.5 ; v1(515,302.5) 514.999,303.001 516.27,304.271 U8.2@516.27,305.912 ; U8.4@518.81,305.912 518.81,304.271 520.196,302.885 v1(520.196,302.5) v1@520.696,302 ; U8.5@518.81,311.5 519.882,311.5 519.893,311.511 v1(520.196,311.511) v1@520.5,311.511 ; v1(528.835,290.5) 528.951,290.5 529.951,289.5 C5.2@529.951,287.862 ; C41.2@534.009,205.365 536.411,205.365 538.786,207.74 ; v1@553.34,257.08 v1(553.42,257)
  Top Layer w1: C16.2@488.8,309.8 487.886,308.886 487.886,302.194 488.58,301.5 C19.1@489.5,301.5 ; v1@520.696,302 C23.2@522.839,302 ; C37.2@540.8,214.452 v1(540.8,221.5) C38.2@540.8,225.145
  Top Layer w1.5: C25.2@480.746,164.5 v1(480.746,167) ; SIC.14@489.236,158.5 SIC.14@489.261,158.525 ; SIC.13@489.896,158.525 SIP.24@501.707,158.525 ; 492.696,158.599 C29.2@492.696,164.5 492.696,168.926 CF1.1@492.77,169 ; C31.2@499.542,164.5 v1(499.542,166.954) ; C33.2@506.3,225.145 512.355,225.145 513.121,224.379 R19.1@513.121,221.576 ; SIP.14@508.057,158.525 508.089,158.493 510.968,158.493 511.647,159.172 C35.2@511.647,164.5 511.647,184.53 512.533,185.416 519.893,185.416 ; C42.1@519.893,189.599 519.893,185.416 ; 520.664,185.416 519.893,185.416 ; R31.2@527.504,197.586 529.691,197.586 530.5,196.776 C43.1@530.5,189.599 v1(532.5,189.599) ; C6.2@547.145,287.862 C11.2@551.922,287.862 ; Cd6.2@551.3,257.08 v1@553.34,257.08 ; C8.2@551.922,293.845 C11.2@551.922,287.862 ; C51.1@554,189.599 554,196.5 555.086,197.586 R42.2@559.136,197.586 ; C47.2@557.3,225.084 564.084,225.084 564.851,224.317 R37.1@564.851,221.576 v1(583,221.576) ; U6.1@562.128,285.212 562.128,286.872 561.138,287.862 C10.2@556.5,287.862 C11.2@551.922,287.862
  Bottom Layer w0.6: v1(566.43,189.599) v1@566.5,189.529
  other v1: 489.5,221.576